# EAGLE board untitled (EAGLE 9.3.1)
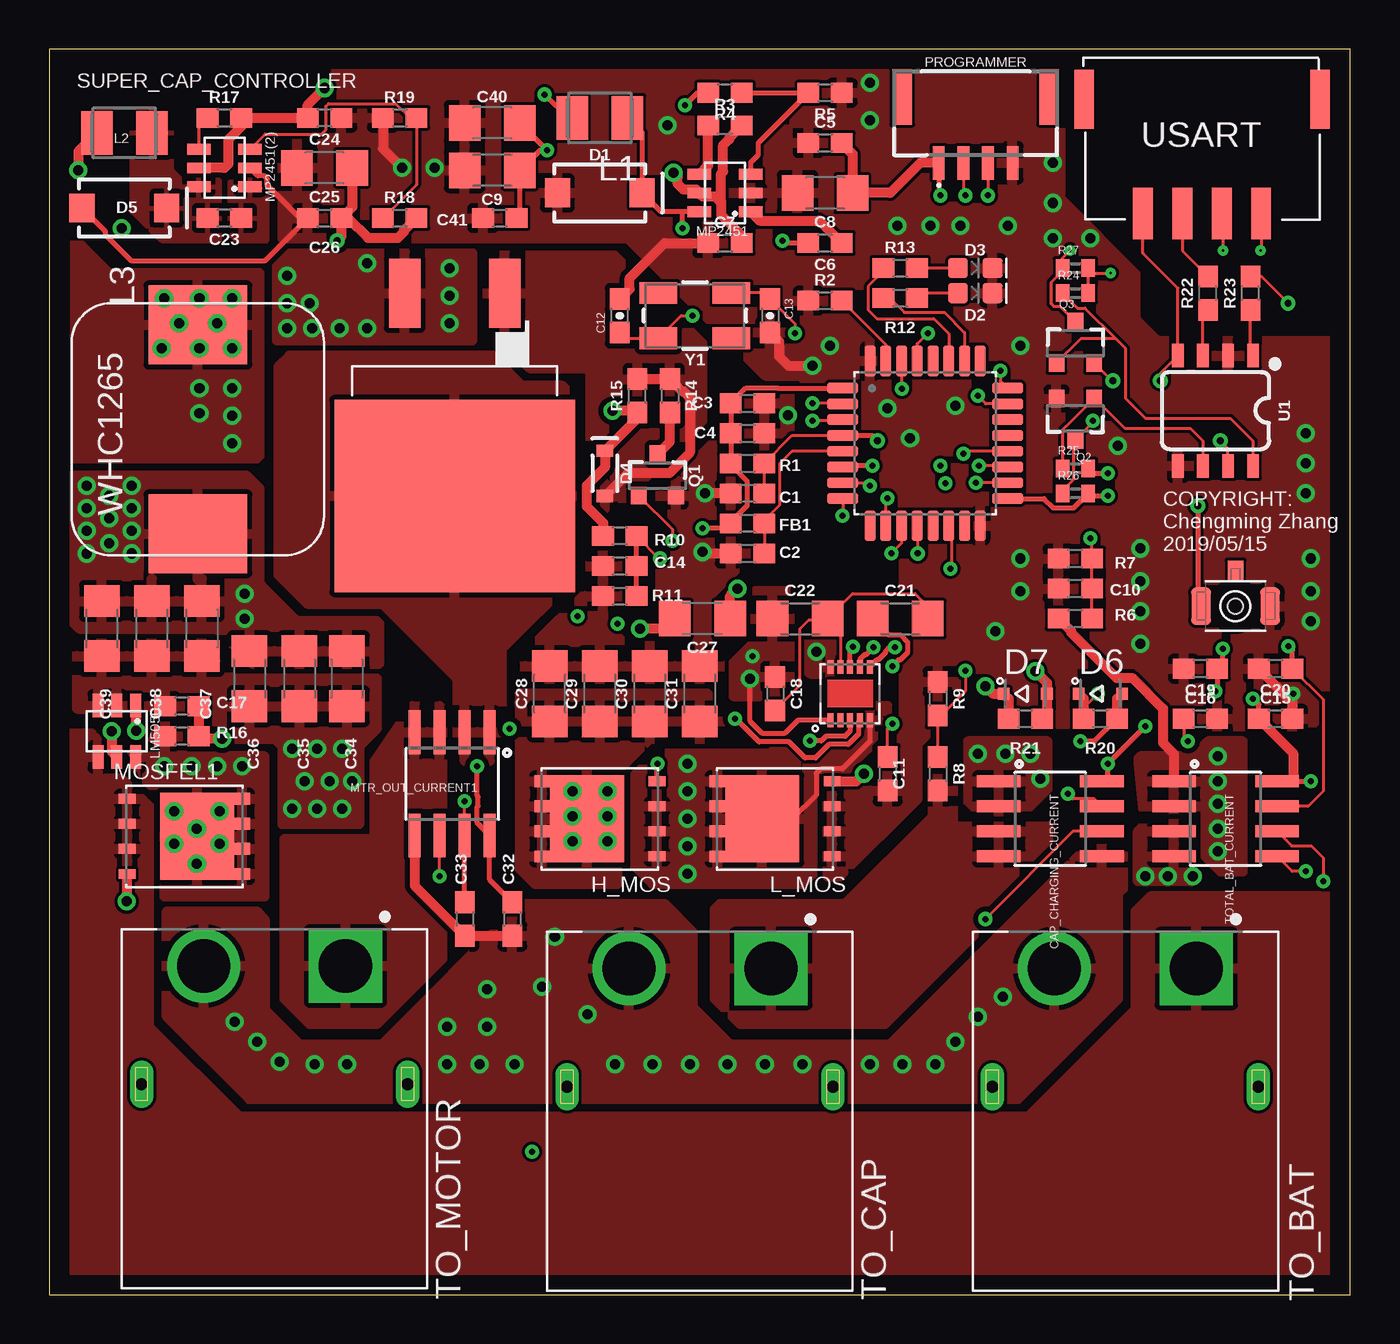
[diagram p0: board, top side]
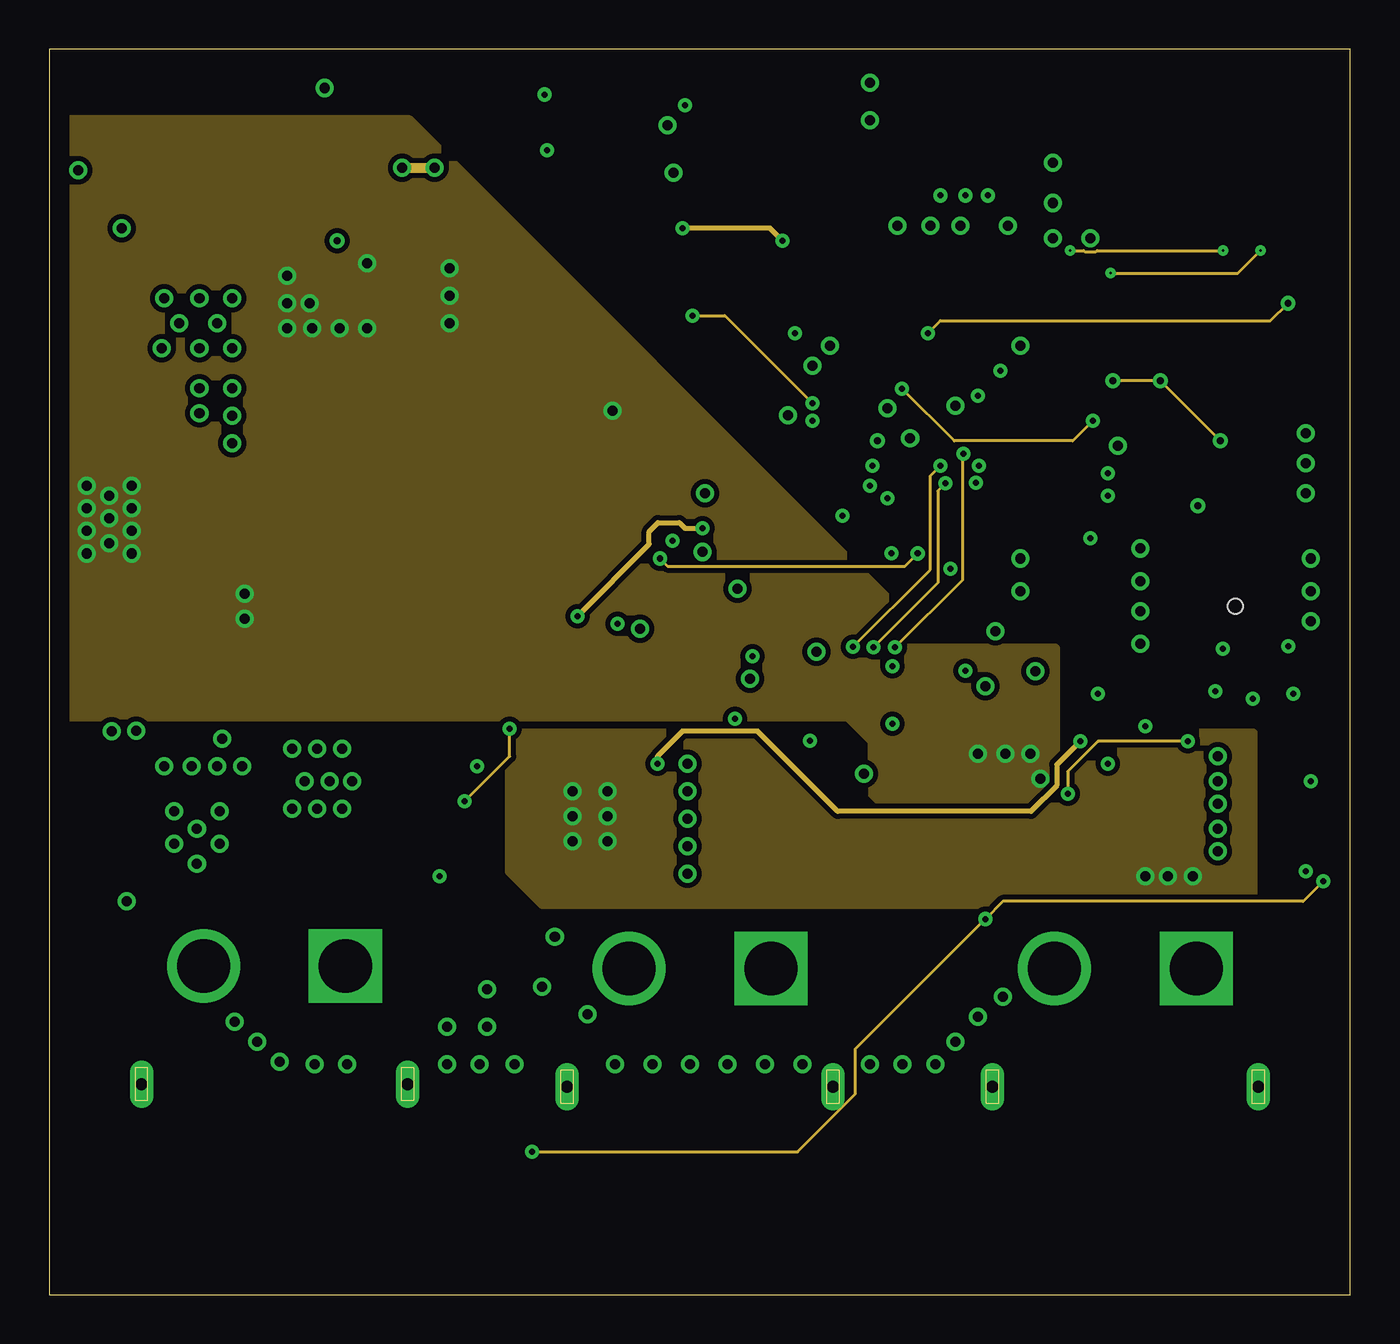
[diagram p1: board, inner layer Signal1]
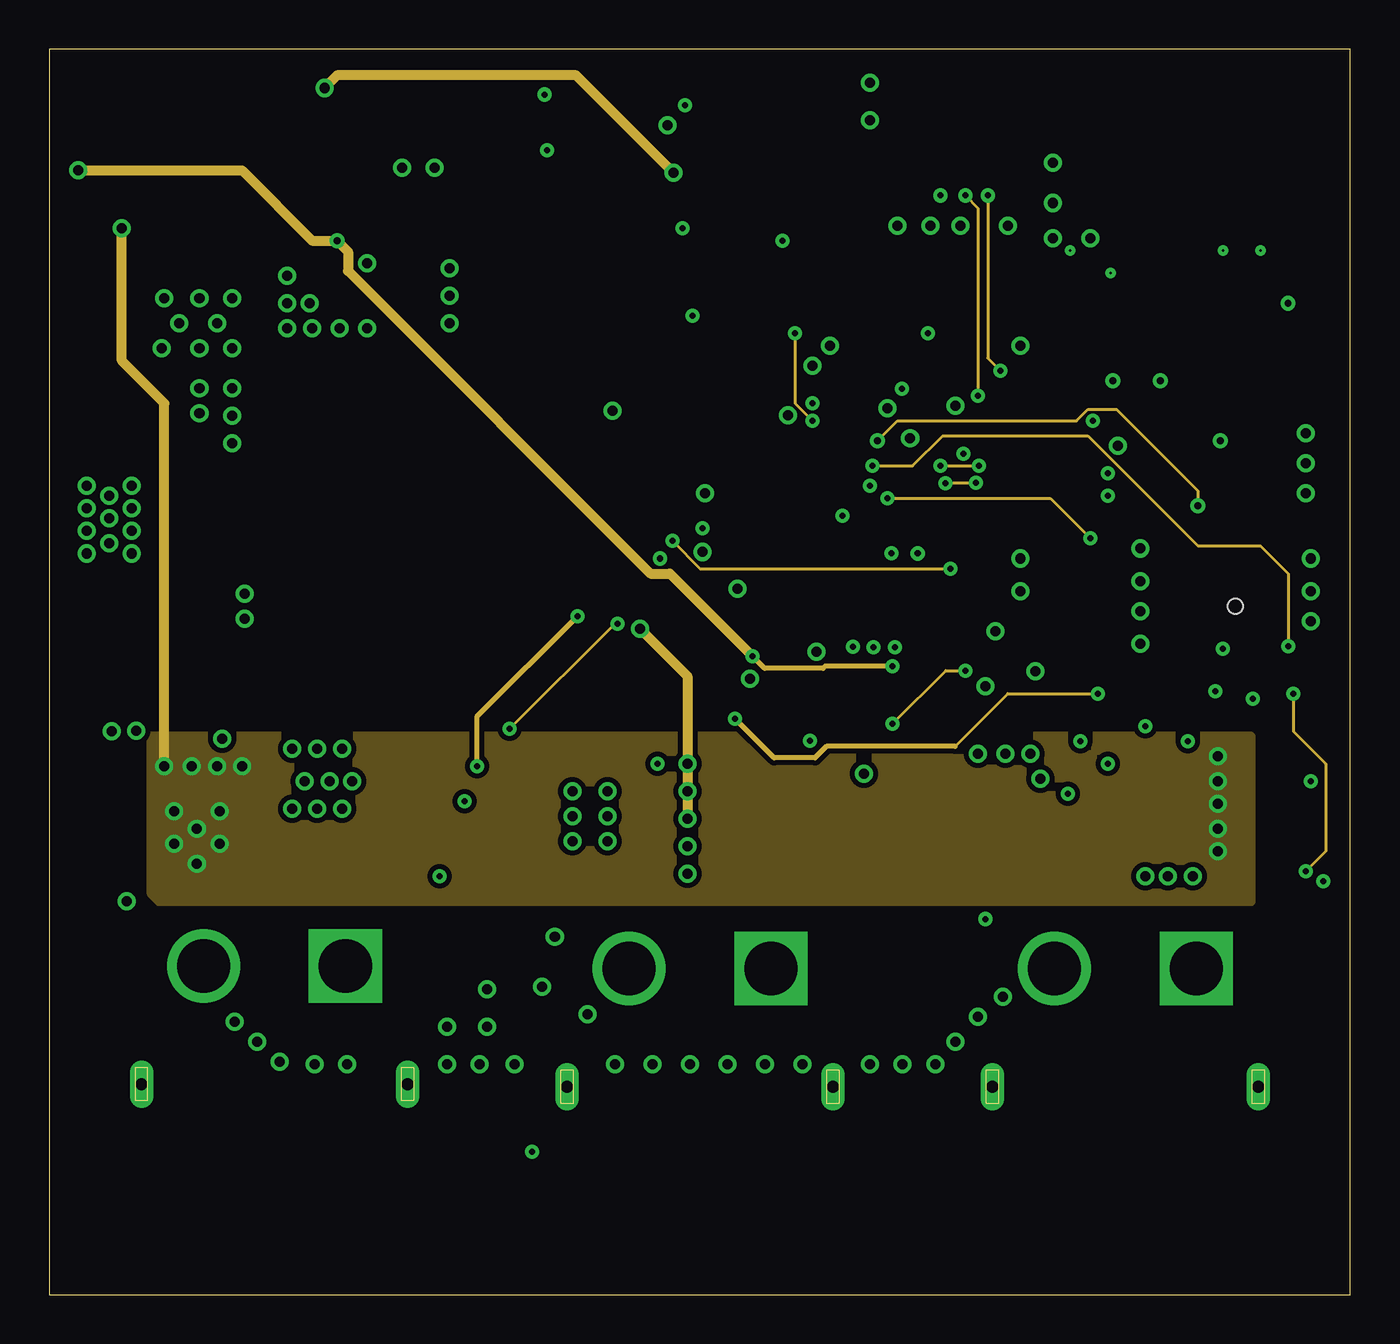
[diagram p2: board, inner layer Signal2]
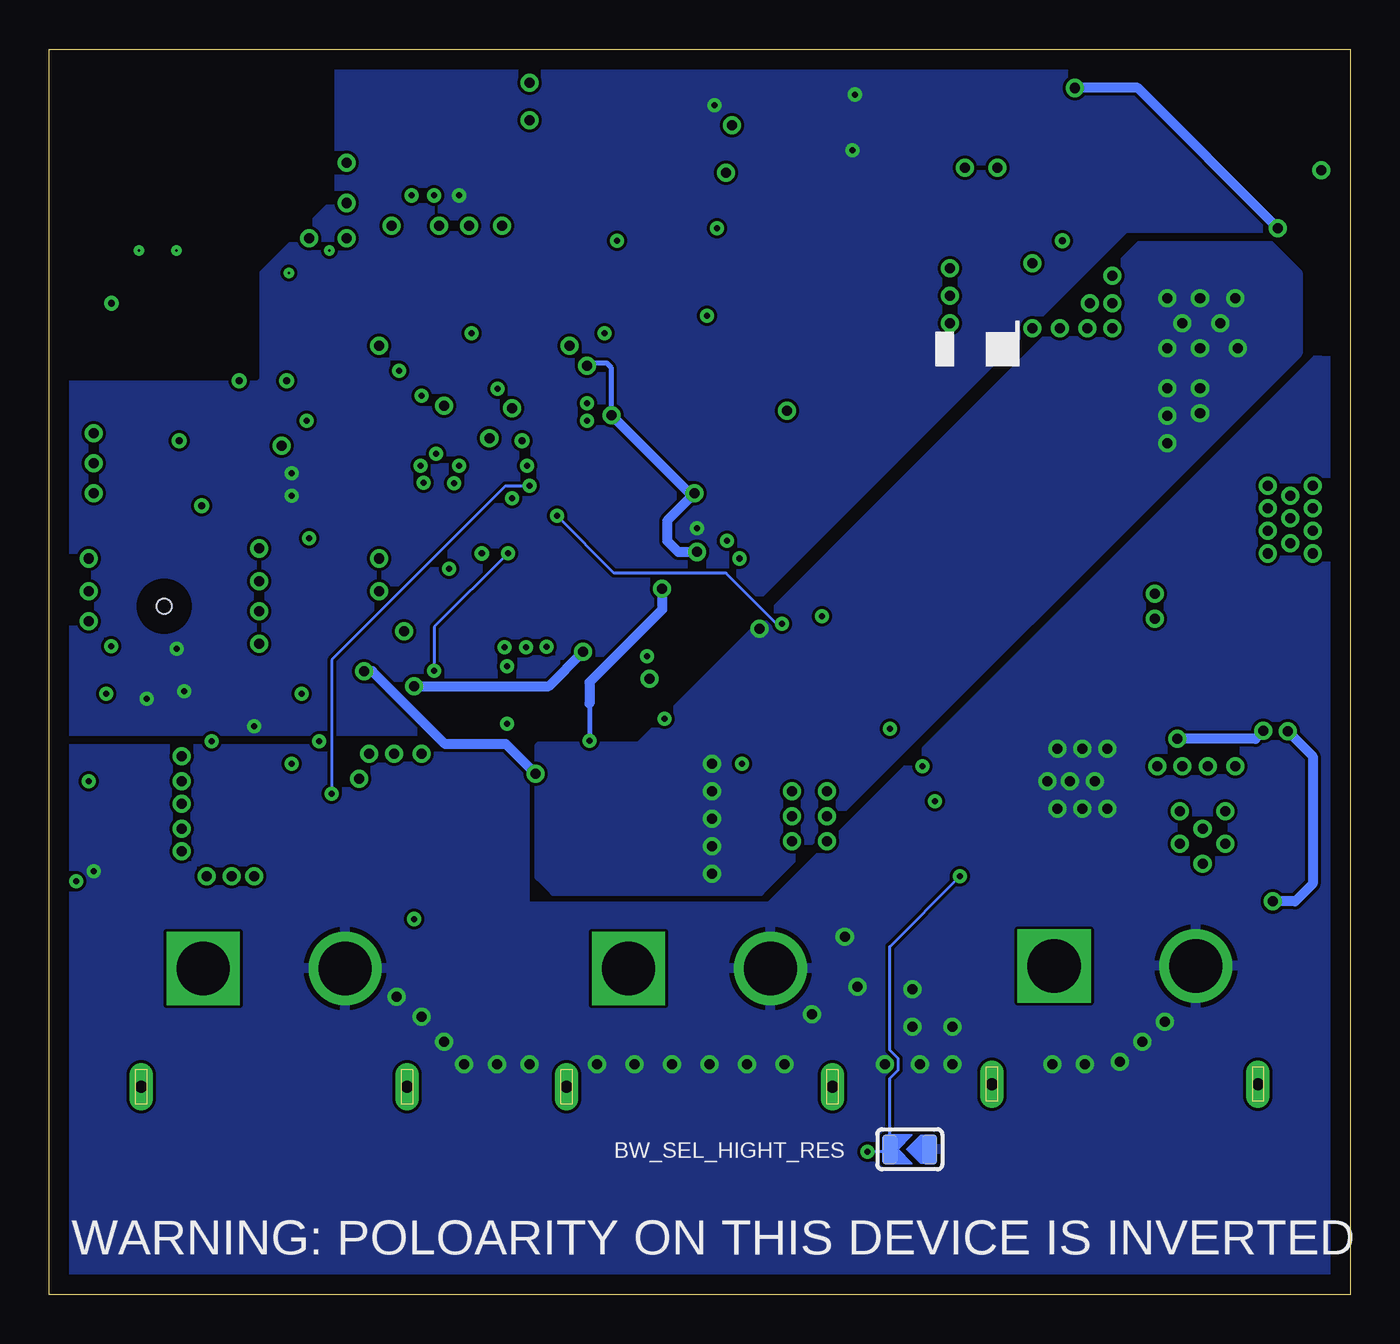
[diagram p3: board, bottom side, seen from below]

Size 66.02 x 63.17 mm. Coordinates in mm from the lower left corner, seen from the top.
Outline: 0,0 66.02,0 66.02,63.17 0,63.17 0,0
Copper layers (1+2*15+16): Top 0.035mm / dielectric 1.5mm / Signal1 0.035mm / dielectric 0.15mm / Signal2 0.035mm / dielectric 0.2mm / Bottom 0.035mm
Design rules "default *": minimum track width 6mil, minimum drill 5mil, track to track 6mil, track to pad 6mil, pad to pad 6mil, via to via 6mil, smd to smd 6mil, copper to edge 40mil, drill to drill 6mil, minimum pad ring 10mil, minimum via ring 8mil, stop-mask expansion 4mil, vias tented up to drill 21mil, thermal gap 10mil
Net classes: 0 default: width 0.508 mm, drill 0.508 mm, clearance 0.254 mm; 1 sig: width 0.127 mm, drill 0.127 mm, clearance 0.127 mm; 2 VCC: width 0.254 mm, drill 0.254 mm, clearance 0.127 mm

## Footprints (pad centres in the part's own frame; a part is rotated, then mirrored left to right if it is on the bottom)
SOLDERJUMPER_ARROW_NOPASTE = smd 0.762 x 1.524: 1 -1.016,0; 2 1.016,0
0603 = smd 1.1 x 1: 1 -0.85,0; 2 0.85,0
1206 = smd 1.6 x 1.8: 1 -1.4,0; 2 1.4,0
0603-CAP = smd 1.1 x 1: 1 -0.85,0; 2 0.85,0
SO08 = smd 0.61 x 2.21: 1 -1.905,-2.616; 2 -0.635,-2.616; 3 0.635,-2.616; 4 1.905,-2.616; 5 1.905,2.616; 6 0.635,2.616; 7 -0.635,2.616; 8 -1.905,2.616
SMA-DIODE = smd 1.27 x 1.47: A -2.15,0; C 2.15,0
LED-0603 = smd 1 x 1: A -0.877,0; C 0.877,0
SOD-323 = smd 0.63 x 0.83: A 1.15,0; C -1.15,0
SOD323 = smd 0.6 x 0.6: A 1.1,0; C -1.1,0
TRANS_BSC076N06NS3-G = smd 0.85 x 0.5: 1 -2.9,1.905; 2 -2.9,0.635; 3 -2.9,-0.635; 4 -2.9,-1.905 | smd 0.8 x 0.6: 5 2.925,-1.905; 6 2.925,-0.635; 7 2.925,0.635; 8 2.925,1.905 | smd 3.75 x 4.41: 9 0.65,0
L3230M = smd 1.6 x 2.2: 1 -1.4,0; 2 1.4,0
WHC1265-10UH = smd 4 x 5: P$1 1.1,6.4; P$2 11.7,6.4
TSOT-23-6-SOT-23-6 = smd 1.2 x 0.55: PIN1 -1.3,0.95; PIN2 -1.3,0; PIN3 -1.3,-0.95; PIN4 1.3,-0.95; PIN5 1.3,0; PIN6 1.3,0.95
D2PAK = smd 1.6 x 3.5: 1 -2.54,-10.28; 3 2.54,-10.28 | smd 12.2 x 9.75: 2 0,0
BM04B-GHS-TBT = smd 0.6 x 1.7: 1 1.915,5.08; 2 3.165,5.08; 3 4.415,5.08; 4 5.665,5.08 | smd 1 x 2.8: A 0.065,1.73; B 7.515,1.73
SOT23-3 = smd 0.8 x 0.9: 1 -0.95,-1; 2 0.95,-1; 3 0,1.1
C0402 = smd 0.7 x 0.9: 1 -0.65,0; 2 0.65,0
SWITCH-TACT-B3U-1100P-B = smd 1 x 1.9: 1 -1.75,0; 2 1.75,0 | smd 0.8 x 1.1: BOSS 0,1.75 | hole 0.762: 0,0
AMASS_XT60PW-M = drill 2.7 square: 1 -3.6,-6 | drill 2.7: 2 3.6,-6 | drill 0.6 pad 1.2 long: S1 -6.75,0; S2 6.75,0
SO08' = smd 0.6 x 1.2: 1 -1.905,-2.8; 2 -0.635,-2.8; 3 0.635,-2.8; 4 1.905,-2.8; 5 1.905,2.8; 6 0.635,2.8; 7 -0.635,2.8; 8 -1.905,2.8
QFP80P900X900X160-32N = smd 1.56 x 0.55: 1 -4.18,2.8; 2 -4.18,2; 3 -4.18,1.2; 4 -4.18,0.4; 5 -4.18,-0.4; 6 -4.18,-1.2; 7 -4.18,-2; 8 -4.18,-2.8; 17 4.18,-2.8; 18 4.18,-2; 19 4.18,-1.2; 20 4.18,-0.4; 21 4.18,0.4; 22 4.18,1.2; 23 4.18,2; 24 4.18,2.8 | smd 0.55 x 1.56: 9 -2.8,-4.18; 10 -2,-4.18; 11 -1.2,-4.18; 12 -0.4,-4.18; 13 0.4,-4.18; 14 1.2,-4.18; 15 2,-4.18; 16 2.8,-4.18; 25 2.8,4.18; 26 2,4.18; 27 1.2,4.18; 28 0.4,4.18; 29 -0.4,4.18; 30 -1.2,4.18; 31 -2,4.18; 32 -2.8,4.18
QFN10 = smd 0.7 x 0.3: 1 -0.08,-0.27; 2 -0.08,-0.77; 3 -0.08,-1.27; 4 -0.08,-1.77; 5 -0.08,-2.27; 6 2.62,-2.27; 7 2.62,-1.77; 8 2.62,-1.27; 9 2.62,-0.77; 10 2.62,-0.27
S4B-PH-SM4_TB = smd 1 x 2.6: 1 3.27,7.9; 2 5.27,7.9; 3 7.27,7.9; 4 9.27,7.9 | smd 1 x 3: GND 0.286,2.1; GND2 12.254,2.1
CRYSTAL-SMD-5X3.2-4PAD = smd 1.9 x 1.1: 1 -1.85,-1.15; 2 1.85,-1.15; 3 1.85,1.15; 4 -1.85,1.15

## Placement (x,y rotation side)
BW_SEL_HIGHT_RES  [SOLDERJUMPER_ARROW_NOPASTE]  22.35,7.37 180 bottom
C1  0.1uF  [0603]  35.43,40.64 180 top
C2  4.7uF  [0603]  35.43,37.59 180 top
C3  0.1uF  [0603]  35.43,45.21 0 top
C4  0.1uF  [0603]  35.43,43.69 0 top
C5  0.1uF  [0603]  39.37,58.42 0 top
C6  0.1uF  [0603]  39.37,53.34 180 top
C7  0.1uF  [0603]  34.29,53.34 0 top
C8  4.7uF  [1206]  39.37,55.88 180 top
C9  4.7uF  [1206]  22.48,57.02 180 top
C10  0.1uF  [0603]  52.07,35.81 180 top
C11  0.1uF  [0603]  42.55,26.42 270 top
C12  22p  [0603-CAP]  28.96,49.66 90 top
C13  22p  [0603-CAP]  36.58,49.66 270 top
C14  0.1uF  [0603]  28.96,36.96 180 top
C15  0.1uF  [0603]  62.23,29.21 0 top
C16  1nF  [0603]  58.42,29.21 0 top
C17  0.1uF  [0603]  6.73,29.84 180 top
C18  0.1uF  [0603]  36.83,30.48 270 top
C19  0.1uF  [0603]  58.42,31.75 180 top
C20  1nF  [0603]  62.23,31.75 180 top
C21  4.7uF  [1206]  43.18,34.29 0 top
C22  4.7uF  [1206]  38.1,34.29 0 top
C23  0.1uF  [0603]  8.89,54.61 180 top
C24  0.1uF  [0603]  13.97,59.69 180 top
C25  4.7uF  [1206]  13.97,57.15 180 top
C26  0.1uF  [0603]  13.97,54.61 0 top
C27  4.7uF  [1206]  33.15,34.29 180 top
C28  4.7uF  [1206]  25.4,30.48 90 top
C29  4.7uF  [1206]  27.94,30.48 90 top
C30  4.7uF  [1206]  30.48,30.48 90 top
C31  4.7uF  [1206]  33.02,30.48 90 top
C32  0.1uF  [0603]  23.5,19.05 270 top
C33  1nF  [0603]  21.08,19.05 270 top
C34  22uF  [1206]  15.11,31.24 270 top
C35  22uF  [1206]  12.7,31.24 270 top
C36  22uF  [1206]  10.16,31.24 270 top
C37  22uF  [1206]  7.75,33.78 270 top
C38  22uF  [1206]  5.21,33.78 270 top
C39  22uF  [1206]  2.67,33.78 270 top
C40  4.7uF  [1206]  22.48,59.44 180 top
C41  0.1uF  [0603]  22.86,54.61 0 top
CAP_CHARGING_CURRENT  ACS723  [SO08]  50.8,24.13 270 top
D1  3A/40V/500mV  [SMA-DIODE]  27.94,55.88 0 top
D2  RED  [LED-0603]  46.99,50.8 0 top
D3  GREEN  [LED-0603]  46.99,52.07 0 top
D4  MMSZ5242/12v  [SOD-323]  28.19,41.66 270 top
D5  3A/40V/500mV  [SMA-DIODE]  3.81,55.12 0 top
D6  1N4148WS  [SOD323]  53.34,30.48 0 top
D7  1N4148WS  [SOD323]  49.53,30.48 0 top
FB1  600Ω/1.8A  [0603]  35.43,39.12 180 top
H_MOS  BSC018N04  [TRANS_BSC076N06NS3-G]  27.94,24.13 180 top
L1  SWPA3012S4R7MT  [L3230M]  27.94,59.69 180 top
L2  SWPA3012S4R7MT  [L3230M]  3.81,58.93 180 top
L3  WHC1265-10UH  [WHC1265-10UH]  1.14,50.29 270 top
L_MOS  BSC018N04  [TRANS_BSC076N06NS3-G]  36.83,24.13 180 top
LM5050  LM5050  [TSOT-23-6-SOT-23-6]  3.43,28.57 270 top
MOSFEL1  BSC018N04  [TRANS_BSC076N06NS3-G]  6.86,23.24 0 top
MOTOR_MOS  IRF4905S  [D2PAK]  20.57,40.51 180 top
MP2451  MP2451  [TSOT-23-6-SOT-23-6]  34.29,55.88 180 top
MP2451(2)  MP2451  [TSOT-23-6-SOT-23-6]  8.89,57.15 180 top
MTR_OUT_CURRENT1  ACS723  [SO08]  20.45,25.91 180 top
PROGRAMMER  BM04B-GHS-TBT  [BM04B-GHS-TBT]  50.8,62.48 180 top
Q1  S8050/25v 500mW  [SOT23-3]  30.86,41.53 0 top
Q2  NPN  [SOT23-3]  52.07,44.45 180 top
Q3  NPN  [SOT23-3]  52.07,48.26 0 top
R1  10K  [0603]  35.43,42.16 0 top
R2  10K  [0603]  39.37,50.42 0 top
R3  100K  [0603]  34.29,59.31 0 top
R4  124K  [0603]  34.29,60.96 180 top
R5  40.2k  [0603]  39.37,60.96 180 top
R6  16.2k  [0603]  52.07,34.29 180 top
R7  1.69k  [0603]  52.07,37.34 0 top
R8  16.2k  [0603]  45.09,26.42 270 top
R9  1.69k  [0603]  45.09,30.23 270 top
R10  16.2k  [0603]  28.96,38.48 180 top
R11  1.69k  [0603]  28.96,35.43 0 top
R12  1k  [0603]  43.18,50.55 0 top
R13  1k  [0603]  43.18,52.07 0 top
R14  100  [0603]  31.5,45.59 270 top
R15  10k  [0603]  29.84,45.59 90 top
R16  100  [0603]  6.73,28.32 180 top
R17  100K  [0603]  8.89,59.69 0 top
R18  124K  [0603]  17.78,54.61 0 top
R19  8.87k  [0603]  17.78,59.69 0 top
R20  470  [0603]  53.34,29.21 0 top
R21  470  [0603]  49.53,29.21 0 top
R22  220  [0603]  58.8,50.8 90 top
R23  220  [0603]  60.96,50.8 90 top
R24  10K  [C0402]  52.07,50.8 0 top
R25  10K  [C0402]  52.07,41.91 0 top
R26  10K  [C0402]  52.07,40.64 0 top
R27  10K  [C0402]  52.07,52.07 0 top
RESET  !RST  [SWITCH-TACT-B3U-1100P-B]  60.2,34.92 0 top
TO_BAT  XT60PW-M  [AMASS_XT60PW-M]  54.61,10.54 180 top
TO_CAP  XT60PW-M  [AMASS_XT60PW-M]  33.02,10.54 180 top
TO_MOTOR  XT60PW-M  [AMASS_XT60PW-M]  11.43,10.67 180 top
TOTAL_BAT_CURRENT  ACS723  [SO08]  59.69,24.13 270 top
U1  DUAL-OPTOISOLATOR_SOIC8  [SO08']  59.18,44.83 180 top
U$1  STM32F334K8T  [QFP80P900X900X160-32N]  44.45,43.18 0 top
U$6  MP1907GQ-Z  [QFN10]  39.37,29.21 90 top
USART  S4B-PH-SM4_TB  [S4B-PH-SM4_TB]  64.77,62.74 180 top
Y1  16MHz  [CRYSTAL-SMD-5X3.2-4PAD]  32.77,49.66 180 top

## Library data of the parts
BW_SEL_HIGHT_RES = microbuilder; BOM: EXCLUDE
C1-C7 C10 C11 C14 C15 C17-C19 C23 C24 C26 C32 C41 = SparkFun-Capacitors; PROD_ID: CAP-00810
C8 C9 C21 C22 C25 C27-C31 C34-C40 = SparkFun-Capacitors; PROD_ID: CAP-10300
C12 C13 RESET = stm32f4stamp; OC_NEWARK: unknown
C16 C20 C33 = SparkFun-Capacitors; PROD_ID: CAP-07886
CAP_CHARGING_CURRENT MTR_OUT_CURRENT1 TOTAL_BAT_CURRENT = SparkFun-Sensors; PART_#: ACS723ACS723LLCTR-05AB-T2; PROD_ID: IC-13872
D1 D5 = SparkFun-DiscreteSemi; PROD_ID: DIO-09886
D2 = SparkFun-LED; PROD_ID: DIO-00819
D3 = SparkFun-LED; PROD_ID: DIO-00821
D4 = SparkFun-DiscreteSemi; PROD_ID: DIO-12442
D6 D7 = 1N4148WS; AVAILABILITY: Unavailable; DESCRIPTION: Diode Switching 75V 0.3A 2-Pin SOD-323 T/R; MF: ON Semiconductor; MP: 1N4148WS; PACKAGE: S-0 Good-Ark; PRICE: None
FB1 = SparkFun-Coils; PROD_ID: NDUC-13805
H_MOS L3 L_MOS LM5050 MOSFEL1 MOTOR_MOS MP2451 MP2451(2) U$1 U$6 USART = NewKevinMade
L1 L2 = rcl; SPICEPREFIX: L
PROGRAMMER = SamacSys_Parts
Q1 = SparkFun-DiscreteSemi; PROD_ID: TRANS-08049
Q2 Q3 R24-R27 = SparkFun
R1-R23 = SparkFun-Resistors
TO_BAT TO_CAP TO_MOTOR = XT60PW-M; AVAILABILITY: Unavailable; MF: AMASS; MP: XT60PW-M; PACKAGE: Package Analog Devices; PRICE: None
U1 = SparkFun-DiscreteSemi; PROD_ID: IC-09076
Y1 = SparkFun-Clocks; PROD_ID: XTAL-08218; SF_ID: COM-00094

## Nets
3V3_FB [sig]: MP2451.PIN3 R4.1 R5.2
12V_FB [sig]: MP2451(2).PIN3 R18.1 R19.2
BAT_VSENSE [sig]: C10.1 R6.1 R7.2 U$1.10
BW_SEL [sig]: BW_SEL_HIGHT_RES.2 CAP_CHARGING_CURRENT.6 MTR_OUT_CURRENT1.6 TOTAL_BAT_CURRENT.6
CAP_CURRENT_SENSE [sig]: C16.1 CAP_CHARGING_CURRENT.7 U$1.7
CAP_VSENSE [sig]: C11.1 R8.1 R9.2 U$1.11
DRV_EN [sig]: U$1.20 U$6.6
DRV_H [sig]: D6.A H_MOS.4 R20.2
DRV_HS_IN [sig]: U$1.18 U$6.7
DRV_L: D7.A L_MOS.4 R21.2
DRV_LS_IN [sig]: U$1.19 U$6.8
GND [sig]: BW_SEL_HIGHT_RES.1 C1.2 C2.2 C3.2 C4.2 C5.1 C7.1 C8.2 C9.2 C10.2 C11.2 C12.2 C13.2 C14.2 C15.2 C16.2 C17.2 C19.2 C20.2 C24.1 C25.2 C26.1 C28.2 C29.2 C30.2 C31.2 C32.2 C33.2 C34.2 C35.2 C36.2 C37.2 C38.2 C39.2 C40.2 C41.1 CAP_CHARGING_CURRENT.5 D1.A D2.C D3.C D5.A L_MOS.1 L_MOS.2 L_MOS.3 LM5050.PIN2 LM5050.PIN3 MP2451(2).PIN2 MP2451.PIN2 MTR_OUT_CURRENT1.5 PROGRAMMER.1 Q1.2 Q2.2 R2.1 R5.1 R7.1 R9.1 R11.1 R19.1 RESET.2 TO_BAT.2 TO_CAP.2 TO_MOTOR.2 TOTAL_BAT_CURRENT.5 U1.2 U1.5 U$1.16 U$1.32
IN_CURRENT_SENSE [sig]: C20.1 TOTAL_BAT_CURRENT.7 U$1.6
LEDG [sig]: R13.1 U$1.27
LEDR [sig]: R12.1 U$1.26
MTR_CURRENT_SENSE [sig]: C33.1 MTR_OUT_CURRENT1.7 U$1.8
MTR_EN [sig]: Q1.1 U$1.14
N$2 [sig]: D2.A R12.2
N$3 [sig]: MP2451.PIN4 R3.1
N$4 [sig]: D3.A R13.2
N$5 [VCC]: C6.1 MP2451.PIN1
N$6 [sig]: C2.1 FB1.1 U$1.5
N$7 [VCC]: C6.2 D1.C L1.1 MP2451.PIN6
N$8 [sig]: R2.2 U$1.31
N$9: Q1.3 R14.2
N$10: D4.A MOTOR_MOS.1 R14.1 R15.2
N$11: C17.1 LM5050.PIN1 R16.1
N$12 [sig]: C18.2 C21.2 C22.2 U$6.9
N$13 [sig]: LM5050.PIN5 MOSFEL1.4
N$14 [sig]: MP2451(2).PIN4 R17.1
N$15 [VCC]: C23.1 MP2451(2).PIN1
N$16 [sig]: C23.2 D5.C L2.1 MP2451(2).PIN6
N$17 [sig]: C27.1 U$6.3
N$18 [sig]: D6.C R20.1 U$6.4
N$19 [sig]: R23.1 U1.1
N$20 [sig]: D7.C R21.1 U$6.10
N$21 [sig]: R22.1 U1.3
NRST [sig]: C1.1 R1.2 RESET.1 U$1.4
OSC_IN [sig]: C12.1 U$1.2 Y1.3
OSC_OUT [sig]: C13.1 U$1.3 Y1.1
OUT1N [sig]: Q3.1 R24.1 U1.8
OUT2N [sig]: Q2.1 R25.1 U1.6
OUT_VSENSE [sig]: C14.1 R10.1 R11.2 U$1.12
PA3 [sig]: U$1.9
PA7 [sig]: U$1.13
PA11 [sig]: U$1.21
PA12 [sig]: U$1.22
PA15 [sig]: U$1.25
PB1 [sig]: U$1.15
PB5 [sig]: U$1.28
RX [sig]: Q2.3 R26.1 U$1.30
SIG_GND [sig]: Q3.2 U1.4 U1.7 USART.4
SIG_RX [sig]: R22.2 USART.3
SIG_TX [sig]: Q3.3 R27.1 USART.2
SIG_VCC [sig]: R24.2 R27.2 USART.1
SYS_SWCLK [sig]: PROGRAMMER.2 U$1.24
SYS_SWDIO [sig]: PROGRAMMER.3 U$1.23
TX [sig]: R23.2 U$1.29
VBAT: C7.2 C24.2 LM5050.PIN6 MOSFEL1.5 MOSFEL1.6 MOSFEL1.7 MOSFEL1.8 MOSFEL1.9 MP2451(2).PIN5 MP2451.PIN5 R3.2 R6.2 R16.2 R17.2 TOTAL_BAT_CURRENT.1 TOTAL_BAT_CURRENT.2
VBAT_RAW [VCC]: LM5050.PIN4 MOSFEL1.1 MOSFEL1.2 MOSFEL1.3 TO_BAT.1
VCAP: CAP_CHARGING_CURRENT.3 CAP_CHARGING_CURRENT.4 R8.2 TO_CAP.1
VCC [VCC]: C3.1 C4.1 C5.2 C8.1 C9.1 C15.1 C19.1 C32.1 C40.1 C41.2 CAP_CHARGING_CURRENT.8 FB1.2 L1.2 MTR_OUT_CURRENT1.8 PROGRAMMER.4 R1.1 R4.2 R25.2 R26.2 TOTAL_BAT_CURRENT.8 U$1.1 U$1.17
VCC_12V [VCC]: C18.1 C21.1 C22.1 C25.1 C26.2 L2.2 R18.2 U$6.1
VMTR: MTR_OUT_CURRENT1.3 MTR_OUT_CURRENT1.4 TO_MOTOR.1
VMTR_T: MOTOR_MOS.2 MTR_OUT_CURRENT1.1 MTR_OUT_CURRENT1.2
VOUT: C34.1 C35.1 C36.1 C37.1 C38.1 C39.1 CAP_CHARGING_CURRENT.1 CAP_CHARGING_CURRENT.2 D4.C L3.P$2 MOTOR_MOS.3 R10.2 R15.1
VSW_NODE [sig]: C27.2 H_MOS.1 H_MOS.2 H_MOS.3 L3.P$1 L_MOS.5 L_MOS.6 L_MOS.7 L_MOS.8 L_MOS.9 U$6.5
VSW_T: C28.1 C29.1 C30.1 C31.1 H_MOS.5 H_MOS.6 H_MOS.7 H_MOS.8 H_MOS.9 TOTAL_BAT_CURRENT.3 TOTAL_BAT_CURRENT.4

## Tracks (layer width: path | path; a pad name or v marks a point on that pad's centre or on a via)
3V3_FB
  Top 0.254: R4.1 R5.2 35.97,58.41 35.97,57.8 35.59,57.42 MP2451.PIN3
12V_FB
  Top 0.152: R18.1 18.63,56.31 R19.2 18.3,59.69 17.57,60.42 14.18,60.42 14.04,60.28 14.04,59.09 13.81,58.86 10.95,58.86 MP2451(2).PIN3
BAT_VSENSE  (via drill 0.3)
  Top 0.152: R6.1 C10.1 R7.2 52.92,38.27 v52.83,38.35 | U$1.10 42.45,40.29 v42.55,40.39
  Signal2 0.152: v42.55,40.39 50.8,40.39 v52.83,38.35
BW_SEL  (via drill 0.3)
  Top 0.152: v19.81,21.21 MTR_OUT_CURRENT1.6 | CAP_CHARGING_CURRENT.6 51.94,23.5 v47.5,19.05 | TOTAL_BAT_CURRENT.6 63.04,22.76 64.05,22.76 64.64,22.16 v64.64,20.95
  Signal1 0.152: v24.51,7.24 37.97,7.24 40.91,10.18 40.91,12.46 47.43,18.99 v47.5,19.05 48.39,19.94 63.63,19.94 v64.64,20.95
  Bottom 0.152: v19.81,21.21 23.37,17.65 23.37,12.4 22.94,11.97 22.94,11.4 23.37,10.97 BW_SEL_HIGHT_RES.2 23.5,7.24 v24.51,7.24
CAP_CURRENT_SENSE  (via drill 0.3)
  Top 0.152: CAP_CHARGING_CURRENT.7 53.03,25.15 51.94,25.15 v51.69,25.4 | C16.1 57.57,28.28 v57.78,28.07 | U$1.7 41.5,41.18 v41.66,41.02
  Signal1 0.152: v51.69,25.4 51.69,26.54 53.21,28.07 v57.78,28.07
  Bottom 0.152: v41.66,41.02 41.67,41.01 42.88,41.01 51.69,32.2 v51.69,25.4
CAP_VSENSE  (via drill 0.3)
  Top 0.152: R8.1 45.09,29.21 | 45.09,29.21 R9.2 | U$1.11 43.25,38.11 v42.75,37.61 | v46.48,31.65 46.48,30.61 45.09,29.21 | C11.1 42.55,28.7 v42.8,28.96
  Signal2 0.152: v42.8,28.96 45.49,31.65 v46.48,31.65
  Bottom 0.152: v42.75,37.61 46.48,33.87 v46.48,31.65
DRV_EN  (via drill 0.3)
  Top 0.152: U$1.20 46.52,42.78 v46.39,42.65
  Top 0.254: v42.93,32.83 42.64,32.83 42.45,32.64 42.45,32.57 42.08,32.2 42.01,32.2 U$6.6
  Signal1 0.152: v42.93,32.83 46.35,36.26 46.35,42.67 46.36,42.68 v46.39,42.65
DRV_H  (via drill 0.3)
  Top 0.254: R20.2 53.05,28.07 v52.32,28.07 | H_MOS.4 30.84,26.9 v30.86,26.92
  Top 0.508: R20.2 54.19,30.23 D6.A
  Signal1 0.254: v52.32,28.07 51.13,26.88 51.13,25.82 49.83,24.51 40.01,24.51 35.94,28.57 32.13,28.57 30.86,27.3 v30.86,26.92
DRV_HS_IN  (via drill 0.3)
  Top 0.152: U$1.18 v47.04,41.18
  Top 0.254: v41.82,32.84 41.44,32.46 41.37,32.46 41.14,32.23 U$6.7
  Signal1 0.152: v41.82,32.84 45.09,36.11 45.09,40.77 v45.47,41.15
  Signal2 0.152: v45.47,41.15 45.5,41.18 v47.04,41.18
DRV_L  (via drill 0.51)
  Top 0.508: L_MOS.4 40.96,26.04 v41.34,26.42 | v50.04,31.62 50.63,31.03 D7.A 50.63,29.46 R21.2
  Bottom 0.508: v41.34,26.42 42.85,27.93 45.93,27.93 49.62,31.62 v50.04,31.62
DRV_LS_IN  (via drill 0.3)
  Top 0.152: U$1.19 48.56,42.05 v47.17,42.05
  Top 0.254: U$6.8 40.64,32.71 v40.78,32.85
  Signal1 0.152: v40.78,32.85 44.7,36.78 44.7,41.53 v45.21,42.04
  Signal2 0.152: v45.21,42.04 47.16,42.04 v47.17,42.05
GND  (via drill 0.3, 0.51)
  Top 0.152: v63.13,30.48 63.13,29.26 C15.2 | v63.75,21.46 63.07,21.46 TOTAL_BAT_CURRENT.5
  Top 0.254: D5.A 2.85,53.93 2.85,53.76 4.15,52.45 10.96,52.45 C26.1 12.73,54.61 11.07,56.27 11.07,56.59 10.91,56.75 10.59,56.75 MP2451(2).PIN2
  Top 0.508: MTR_OUT_CURRENT1.5 18.54,20.74 C33.2 C32.2 | C20.2 63.08,30.05 C15.2 | C12.2 29.46,51.01 29.46,51.57 31.23,53.34 C7.1 | R19.1 16.93,58.13 v17.91,57.15 | C13.2 37.03,48.35 37.03,47.59 37.51,47.12 v38.73,47.12 | C1.2 v33.27,40.64 | v33.15,37.67 33.23,37.59 C2.2
  Signal1 0.508: v17.91,57.15 v19.56,57.15
  Signal2 0.152: v63.13,30.48 63.13,28.56 64.77,26.92 64.77,22.48 v63.75,21.46
  Bottom 0.254: v38.73,47.12 38.61,47.24 37.72,47.24 37.49,47.01 v37.49,44.6
  Bottom 0.508: v37.49,44.6 33.53,40.64 v33.27,40.64 34.67,39.24 34.67,38.23 34.11,37.67 v33.15,37.67
  other vias: 50.93,55.37 52.83,53.59 50.93,53.59 43.05,54.23 49.28,48.13 49.28,37.34 49.28,35.69 55.37,36.2 55.37,34.67 55.37,33.02 55.37,37.85 42.55,44.96 45.97,45.09 43.69,43.43 39.62,48.13 31.37,59.31 12.32,27.69 13.59,27.69 14.86,27.69 15.37,26.04 14.22,26.04 12.95,26.04 12.32,24.64 13.59,24.64 14.86,24.64 9.4,13.84 10.54,12.83 11.68,11.81 13.46,11.68 15.11,11.68 20.19,11.68 21.84,11.68 23.62,11.68 22.23,13.59 22.23,15.49 28.7,11.68 30.61,11.68 32.51,11.68 34.42,11.68 36.32,11.68 38.23,11.68 41.66,11.68 43.31,11.68 44.96,11.68 48.39,15.11 47.12,14.1 45.97,12.83 25.02,15.62 27.3,14.22 25.65,18.16 20.19,13.59 41.66,59.56 41.66,61.47 44.7,54.23 46.23,54.23 48.64,54.23 50.93,57.4 63.75,43.69 63.75,42.16 63.75,40.64 64.01,37.34 64.01,35.69 64.01,34.16 54.23,43.05 48.01,33.66
  pour Top: 5.97,19.43 10.54,19.43 10.92,19.05 10.92,14.48 12.7,12.7 16.89,12.7 24,19.81 31.24,19.81 32.64,18.41 32.64,14.61 34.54,12.7 42.67,12.7 52.58,22.61 54.48,22.61 54.48,20.57 54.23,20.32 54.23,14.99 49.15,9.91 10.16,9.91 5.97,14.1
  pour Top: 1.4,33.02 1.4,29.72 8.26,29.72 8.26,28.32 8.38,28.19 11.43,28.19 11.81,27.81 11.81,23.88 15.75,23.88 15.75,27.81 16.64,28.7 16.64,31.24 9.27,31.24 8.13,32.38 8.13,33.02
  pour Top: 24.13,32.77 24.13,31.24 34.04,31.24 34.04,32.89 29.34,32.89 28.83,33.4 28.83,37.47 27.43,37.47 27.43,35.81 24.38,32.77
  pour Top: 30.99,40.77 30.99,37.08 37.59,37.08 37.59,45.72 36.83,46.48 34.67,46.48 34.42,46.23 34.04,45.85 34.04,43.56 31.37,40.89 30.99,40.89
  pour Top: 11.81,62.74 11.81,53.59 29.34,53.59 36.32,46.61 38.1,46.61 38.35,46.35 38.35,36.32 47.24,36.32 51.56,32 55.12,32 56.26,30.86 56.26,29.08 56.52,28.83 64.01,28.83 65.66,30.48 65.66,62.87 11.81,62.87 11.68,62.74
  pour Bottom: -0.76,19.68 -0.76,-0.51 66.67,-0.51 66.67,27.69 41.91,27.69 41.91,19.68
  pour Top: 39.5,25.27 39.5,21.21 40.13,21.21 44.07,25.15 44.07,27.94 45.09,28.96 51.94,28.96 51.94,37.85 43.35,37.85 43.35,28.41 40.22,25.27
  pour Bottom: -0.51,47.37 -0.51,15.11 34.04,15.11 1.65,47.5 1.52,47.37
  pour Top: 30.86,36.96 30.86,35.43 32.51,35.43 32.77,35.18 32.77,31.5 33.53,31.5 33.53,35.31 34.54,36.32 35.31,37.08 35.31,38.23 32.77,38.23 32.64,38.1 32.51,38.1 31.75,37.34 31.24,37.34
  cutout Top: 51.69,61.98 51.69,55.75 55.5,51.94 55.5,49.66 56.39,48.77 65.02,48.77 65.02,61.98
  cutout Bottom: 51.69,62.1 51.69,55.75 55.5,51.94 55.5,46.48 65.05,46.48 65.05,62 65.15,62.1
IN_CURRENT_SENSE  (via drill 0.3)
  Top 0.152: C20.1 64.64,30.19 64.64,25.53 63.88,24.77 TOTAL_BAT_CURRENT.7
  Top 0.254: C20.1 63.08,32.68 v62.87,32.89 | v41.78,42.04 40.33,42.04 U$1.6
  Signal2 0.152: v41.78,42.04 43.81,42.04 45.34,43.56 52.7,43.56 58.29,37.97 61.47,37.97 62.87,36.58 v62.87,32.89
LEDG
  Top 0.152: U$1.27 45.65,48.75 44.89,49.51 41.99,49.51 41.55,49.95 41.55,51.14 42.33,51.92 R13.1
LEDR
  Top 0.152: R12.1 42.66,50.55 43.38,49.82 45.43,49.82 46.45,48.8 U$1.26
MTR_CURRENT_SENSE  (via drill 0.3)
  Top 0.152: MTR_OUT_CURRENT1.7 v21.08,25.02 | U$1.8 v40.27,39.51 v40.26,39.5
  Top 0.254: C33.1 MTR_OUT_CURRENT1.7
  Signal1 0.152: v21.08,25.02 23.37,27.3 v23.37,28.7
  Signal2 0.152: v23.37,28.7 28.7,34.04 v28.83,34.04
  Bottom 0.152: v28.83,34.04 29.11,34.04 31.68,36.6 37.36,36.6 v40.26,39.5
MTR_EN  (via drill 0.3)
  Top 0.152: Q1.1 31.62,38.82 v31.62,38.23 | U$1.14 45.78,38.87 45.78,36.89 v45.72,36.83
  Signal2 0.152: v31.62,38.23 33.02,36.83 v45.72,36.83
N$2
  Top 0.152: D2.A 44.28,50.8 R12.2
N$3
  Top 0.508: MP2451.PIN4 33.44,57.28 R3.1
N$4
  Top 0.152: D3.A R13.2
N$5
  Top 0.508: MP2451.PIN1 36.04,54.48 39.08,54.48 C6.1
N$6
  Top 0.152: C2.1 FB1.1 36.28,39.27 37.06,40.05 37.06,42.14 37.7,42.78 U$1.5
N$7  (via drill 0.3)
  Top 0.254: L1.1 30.09,58.94 D1.C 31.04,54.93 32.13,54.93 | MP2451.PIN6 32.13,54.93 | C6.2 37.34,53.34 v37.21,53.47 | v32.13,54.1 32.13,54.93
  Signal1 0.254: v37.21,53.47 36.58,54.1 v32.13,54.1
N$8
  Top 0.152: R2.2 42.45,48.19 U$1.31
N$9
  Top 0.508: Q1.3 31.5,43.26 R14.2
N$10
  Top 0.508: R15.2 R14.1 32.14,45.8 32.21,45.8 32.5,45.5 32.5,42.7 31.47,41.67 29.36,41.67 D4.A
  pour Top: 22.23,52.58 22.23,49.15 24.38,46.99 27.43,46.99 27.43,39.75 28.57,39.75 33.15,44.32 33.15,48.26 28.7,52.7 22.35,52.7
N$11  (via drill 0.51)
  Top 0.508: C17.1 R16.1 7.71,28.19 v8.76,28.19 | LM5050.PIN1 4.38,28.63 v4.4,28.61
  Bottom 0.508: v4.4,28.61 4.82,28.19 v8.76,28.19
N$12
  Top 0.152: 39.56,34.23 C22.2 40.77,35.56 43.94,35.56 44.58,34.92 C21.2 | 39.56,34.23 40.14,33.65 U$6.9 | C18.2 38.1,30.9 38.1,33.78 38.55,34.23 39.56,34.23
N$13  (via drill 0.51)
  Top 0.508: v3.17,28.57 3.17,27.53 LM5050.PIN5 | v3.94,19.94 3.96,19.96 MOSFEL1.4
  Bottom 0.508: v3.17,28.57 1.91,27.3 1.91,20.83 2.79,19.94 v3.94,19.94
N$14
  Top 0.152: R17.1 7.59,59.24 MP2451(2).PIN4
N$15
  pour Top: 9.14,56.39 9.14,53.85 9.53,53.47 11.05,53.47 11.05,56.52 9.27,56.52
N$16
  pour Top: 4.19,60.07 4.19,54.99 5.71,53.47 8.64,53.47 8.64,56.52 6.73,56.52 6.22,57.02 6.22,60.07
N$17  (via drill 0.3, 0.51)
  Top 0.254: U$6.3 40.64,28.57 40.39,28.32 39.41,28.32 39.18,28.09 v38.61,28.09
  Top 0.508: C27.1 34.55,35.44 v34.92,35.81
  Bottom 0.254: 38.61,29.97 v38.61,28.09
  Bottom 0.508: v34.92,35.81 34.92,34.74 38.61,31.06 38.61,29.97
N$18  (via drill 0.3)
  Top 0.152: R20.1 52.49,29.76 v53.21,30.48
  Top 0.254: U$6.4 41.07,29.06 41.07,28.43 40.55,27.91 39.57,27.91 38.89,27.23 38.35,27.23 37.54,28.04 36.03,28.04 34.86,29.21 v34.8,29.21
  Top 0.508: R20.1 52.49,30.23 D6.C
  Signal2 0.152: 45.97,27.81 48.64,30.48 v53.21,30.48
  Signal2 0.254: 45.97,27.81 39.45,27.81 38.86,27.23 36.78,27.23 v34.8,29.21
N$19
  Top 0.152: U1.1 60.96,47.76 R23.1
N$20  (via drill 0.51)
  Top 0.508: v47.5,30.86 47.88,30.48 D7.C 48.68,30.23 R21.1 | 38.92,32.55 v38.92,32.61
  Bottom 0.508: v47.5,30.86 40.67,30.86 v38.92,32.61
  pour Top: 38.48,33.15 38.48,31.62 38.61,31.5 39.75,31.5 39.75,33.15
N$21
  Top 0.152: U1.3 58.55,49.7 R22.1
NRST  (via drill 0.35)
  Top 0.152: C1.1 R1.2 37.7,43.58 U$1.4
  Top 0.254: U$1.4 41.76,43.58 v42.04,43.31 | v58.29,40.01 58.29,35.08 RESET.1
  Signal2 0.152: v42.04,43.31 43.05,44.32 52.13,44.32 52.72,44.91 54.15,44.91 58.29,40.77 v58.29,40.01
OSC_IN  (via drill 0.3)
  Top 0.152: C12.1 29.26,48.51 Y1.3 32.07,49.66 v32.64,49.66 | U$1.2 40.24,45.21 v38.73,45.21
  Signal1 0.152: v32.64,49.66 34.29,49.66 v38.73,45.21
OSC_OUT  (via drill 0.3)
  Top 0.152: Y1.1 36.28,50.81 C13.1 37.85,49.24 v37.85,48.77 | U$1.3 40.21,44.32 v38.73,44.32
  Signal2 0.152: v37.85,48.77 37.85,45.21 v38.73,44.32
OUT1N
  Top 0.152: R24.1 52.18,50.04 52.56,50.04 54.1,48.51 | U1.8 61.09,43.31 59.94,44.45 55.63,44.45 54.99,45.09 54.61,45.47 54.61,47.99 54.1,48.51 | Q3.1 52.37,48.51 54.1,48.51
OUT2N
  Top 0.152: R25.1 51.42,43.87 51.58,44.03 51.6,44.03 Q2.1 53.06,45.45 53.58,44.93 53.6,44.93 54.59,43.94 57.91,43.94 58.55,43.31 U1.6
OUT_VSENSE  (via drill 0.3)
  Top 0.152: v30.99,37.34 30.95,37.34 R10.1 | U$1.12 44.05,37.61 v44.07,37.59
  Top 0.254: R11.2 C14.1 R10.1
  Signal1 0.152: v30.99,37.34 31.37,36.96 43.43,36.96 v44.07,37.59
RX  (via drill 0.3)
  Top 0.152: R26.1 51.42,40.79 52,41.37 52,43.28 Q2.3 52.96,44.24 v52.96,44.32 | U$1.30 43.25,45.98 v43.28,45.95
  Signal1 0.152: v43.28,45.95 45.93,43.3 51.94,43.3 v52.96,44.32
SIG_GND  (via drill 0.35)
  Top 0.152: 57.32,47.63 U1.4 | Q3.2 53.92,46.35 v53.98,46.35 | U1.4 56.39,46.74 v56.39,46.35 | U1.4 57.28,51.05 55.5,52.83 USART.4 | U1.7 59.82,42.93 v59.44,43.31
  Signal1 0.152: v53.98,46.35 v56.39,46.35 v59.44,43.31
SIG_RX
  Top 0.152: 58.83,51.68 R22.2 57.5,52.95 USART.3
SIG_TX  (via drill 0.13)
  Top 0.152: Q3.3 51.31,50.12 50.98,50.12 50.84,50.26 50.84,51.34 51.42,51.92 R27.1 51.42,52.56 v51.82,52.96 | USART.2 59.56,54.77 v59.56,52.96
  Signal1 0.152: v51.82,52.96 52.5,52.96 52.55,52.91 53.12,52.91 53.17,52.96 v59.56,52.96
SIG_VCC  (via drill 0.13)
  Top 0.152: R24.2 R27.2 52.97,51.82 v53.85,51.82 | USART.1 61.5,52.99 v61.47,52.96
  Signal1 0.152: v53.85,51.82 60.33,51.82 v61.47,52.96
SYS_SWCLK  (via drill 0.3)
  Top 0.152: PROGRAMMER.2 47.63,55.76 v47.62,55.75 | v48.26,46.86 48.26,46.35 U$1.24
  Signal2 0.152: v47.62,55.75 47.62,47.5 v48.26,46.86
SYS_SWDIO  (via drill 0.3)
  Top 0.152: PROGRAMMER.3 46.38,55.85 v46.48,55.75 | U$1.23 47.53,45.18 v47.12,45.59
  Signal2 0.152: v46.48,55.75 47.12,55.12 v47.12,45.59
TX  (via drill 0.3, 0.35)
  Top 0.152: U$1.29 44.05,48.24 v44.58,48.77 | R23.2 61.51,51.65 v62.87,50.29
  Signal1 0.152: v44.58,48.77 45.21,49.4 61.98,49.4 v62.87,50.29
VBAT  (via drill 0.51)
  Top 0.508: MP2451(2).PIN5 8.89,57.15 9.08,57.34 9.08,58.59 9.74,59.24 R17.2 C24.2 13.12,60.36 v13.97,61.21 | 34.1,55.41 33.8,55.71 33.16,55.71 MP2451.PIN5 32.82,56.05 32.18,56.05 31.88,56.34 31.88,56.69 v31.68,56.9 | 34.1,55.41 34.1,54.77 35.14,53.73 C7.2 | MOSFEL1.9 7.49,23.26 v7.49,23.62 | MOSFEL1.9 7.51,23.38 v8.64,24.51 | MOSFEL1.9 8.26,23.24 v8.64,22.86 | MOSFEL1.9 7.51,21.86 v7.49,21.84 | MOSFEL1.9 7.13,22.86 v6.35,22.86 | MOSFEL1.9 6.35,24.4 v6.35,24.51 | R6.2 51.86,33.65 51.86,33.58 54.15,31.29 54.95,31.29 56.51,29.73 56.51,27.99 57.07,27.43 TOTAL_BAT_CURRENT.1 | 34.1,55.41 34.1,56.86 34.2,56.96 34.2,58.3 34.5,58.6 34.5,58.67 R3.2
  Signal2 0.508: v31.68,56.9 26.73,61.84 14.61,61.84 v13.97,61.21 | v5.84,26.8 5.84,45.21 3.68,47.37 v3.68,54.1
  Bottom 0.508: v3.68,54.1 10.79,61.21 v13.97,61.21
  other vias: 7.24,26.8 8.51,26.8 9.78,26.8 59.31,26.04 59.31,24.89 59.31,23.62 59.31,22.48 59.31,27.3
  pour Top: 3.94,28.07 4.95,26.04 5.84,25.15 5.84,20.19 10.92,20.19 10.92,27.3 6.99,27.3 6.73,27.56 6.73,28.96 4.83,28.96
  pour Signal2: 5.21,28.32 60.96,28.32 60.96,19.94 5.59,19.94 5.21,20.32
  pour Top: 55.24,27.18 55.5,24.64 58.29,24.64 58.67,24.26 58.67,22.23 59.44,21.46 60.58,21.46 60.58,28.07 58.8,28.07 58.04,27.3 55.37,27.3
VBAT_RAW
  pour Top: 5.08,13.59 5.08,24.77 3.68,26.16 2.79,26.16 2.41,26.54 2.41,28.19 2.16,28.45 -0.51,28.45 -0.51,-1.02 66.42,-1.02 66.8,-0.64 66.8,20.19 55.88,20.19 55.12,19.43 55.12,14.48 49.66,9.02 9.65,9.02
VCAP
  pour Top: 44.83,26.16 45.85,26.16 45.85,23.75 50.67,23.75 50.67,21.97 42.42,13.72 35.05,13.72 33.78,14.99 33.78,19.56 34.04,19.81 40.39,19.81 44.83,24.26
VCC  (via drill 0.3)
  Top 0.254: U$1.1 36.96,45.98 36.95,45.99 35.36,45.99 C3.1 C4.1 R1.1 34.58,42.09 35.41,41.26 35.41,40.02 34.58,39.2 FB1.2 34.33,38.86 v33.15,38.86 | 24.13,59.69 C40.1 v25.27,58.04 | 33.02,60.96 R4.2 32.89,60.96 v32.26,60.33 | v53.72,40.51 52.85,40.51 R26.2 51.99,39.91 50.95,39.91 50.48,40.38 U$1.17 | L1.2 26.33,59.69 v25.15,60.88 | v25.27,58.04 | v25.27,58.04 24.9,58.04 C9.1 23.88,54.78 C41.2 | PROGRAMMER.4 45.13,55.83 v45.21,55.75 | v59.56,32.77 59.56,32.04 C19.1 59.27,30.7 v59.18,30.61 | C15.1 61.38,29.93 v61.09,30.23 | TOTAL_BAT_CURRENT.8 63.12,26.04 v64.01,26.04 | CAP_CHARGING_CURRENT.8 53.72,26.34 v53.72,26.92 v55.63,28.83 | C32.1 22.35,21.04 MTR_OUT_CURRENT1.8 21.72,23.93 21.72,24.74 21.77,24.79 21.77,25.25 21.72,25.3 v21.72,26.8 | R25.2 52.97,41.66 v53.72,41.66
  Top 0.508: C15.1 63.12,27.47 63.12,26.04 | C5.2 40.77,57.87 C8.1 42.67,55.88 44.2,57.4 PROGRAMMER.4
  Signal1 0.254: v33.15,38.86 32.27,38.86 31.98,39.15 30.89,39.15 30.44,38.71 30.44,38.06 v26.8,34.42
  Signal2 0.254: v21.72,26.8 21.72,29.34 v26.8,34.42
  pour Bottom: -0.13,63.37 -0.13,54.23 0,54.1 11.43,54.1 36.96,28.57 66.93,28.57 66.93,63.25 65.66,64.52 1.02,64.52
VCC_12V  (via drill 0.3, 0.35, 0.51)
  Top 0.254: U$6.1 37.99,29.13 37.31,28.45 36.2,28.45 35.56,29.08 v35.56,31.24 | C21.1 42.6,33.47 43.19,33.47 43.56,33.09 43.56,32.57 43.19,32.19 43.12,32.19 v42.8,31.88
  Top 0.508: L2.2 1.47,57.99 v1.47,57.02 | C25.1 15.37,55.16 C26.2 | C26.2 15.16,54.61 16.17,53.6 17.69,53.6 17.99,53.9 17.99,53.97 R18.2 | C26.2 14.82,53.68 v14.61,53.47
  Signal2 0.254: v42.8,31.88 39.38,31.88 39.27,31.77 36.3,31.77 v35.69,32.38
  Signal2 0.508: v1.47,57.02 9.78,57.02 13.34,53.47 v14.61,53.47 15.16,52.91 15.16,51.92 30.51,36.58 31.5,36.58 v35.69,32.38
  pour Top: 35.81,35.69 35.81,33.15 34.71,32.05 34.71,30.35 36.07,30.35 36.2,30.48 37.08,30.48 37.59,30.99 37.59,35.56 37.47,35.69
VMTR
  pour Top: 18.41,29.84 19.81,29.84 19.94,29.72 19.94,17.02 16.64,13.72 13.21,13.72 11.94,14.99 11.94,23.11 16.38,23.11 16.51,23.24 16.51,27.05
VMTR_T
  pour Top: 22.48,47.62 12.19,47.62 11.62,47.05 11.62,36.51 13.08,35.05 16.89,35.05 20.7,31.24 20.7,27.3 21.08,26.92 22.35,26.92 22.99,27.56 22.99,32.77 26.67,36.45 26.67,45.47 26.04,46.1 24,46.1
VOUT  (via drill 0.51)
  Top 0.508: v28.57,44.83 29.76,44.83 R15.1 29.84,44.46 D4.C 28.19,41.95 27.27,41.03 27.27,39.98 28.11,39.15 R10.2
  other vias: 1.91,41.02 1.91,39.88 1.91,38.73 1.91,37.59 3.05,40.51 3.05,39.37 3.05,38.1 4.19,41.02 4.19,39.88 4.19,38.73 4.19,37.59 9.91,35.56 9.91,34.29 47.12,27.43 48.51,27.43 49.78,27.43 50.29,26.16 16.13,52.32 20.32,52.07 20.32,50.67 20.32,49.28 16.13,49.02 14.73,49.02 13.34,49.02 12.06,49.02 12.06,50.29 13.21,50.29 12.06,51.69
  pour Top: 0.76,41.15 0.76,34.54 1.52,33.78 8.51,33.78 10.29,32 16.76,32 16.76,34.04 16.64,34.16 12.57,34.16 10.67,36.07 10.67,40.89 10.03,41.53 1.14,41.53
  pour Signal1: -0.38,29.46 -0.25,29.34 40.51,29.34 41.78,28.07 41.78,25.4 42.55,24.64 49.53,24.64 51.05,26.16 51.05,32.77 21.84,32.77 11.05,43.56 -0.25,43.56 -0.38,43.43
  pour Top: 46.61,28.07 46.61,25.02 47.12,24.51 49.53,24.51 50.67,25.65 50.67,28.07
  pour Signal1: -0.51,59.56 -0.51,44.2 14.22,29.46 40.64,29.46 43.05,31.88 43.05,34.8 18.29,59.56
  pour Top: 11.56,48.39 11.56,52.2 12.19,52.83 21.46,52.83 21.46,48.39
VSW_NODE  (via drill 0.51)
  Top 0.254: U$6.5 41.66,29.11 41.66,28.07 40.26,26.67 39.15,26.67 38.92,26.44 38.92,25.34 37.72,24.13 L_MOS.9
  Top 0.508: C27.2 31.24,33.78 v29.97,33.78 | v6.6,49.28 6.69,49.19 L3.P$1 | L3.P$1 7.54,50.47 v7.62,50.55 | L3.P$1 8.9,50.55 v9.27,50.55 | L3.P$1 7.63,49.28 v8.51,49.28 | L3.P$1 8.09,49.19 v9.27,48.01 | L3.P$1 7.62,49.12 v7.62,48.01 | L3.P$1 6.36,48.01 v5.71,48.01 | L3.P$1 7.2,49.19 v5.84,50.55
  Signal2 0.508: v29.97,33.78 32.38,31.37 v32.38,24.13
  other vias: 32.38,22.73 32.38,21.34 32.38,25.53 32.38,26.92 9.27,45.97 9.27,44.58 9.27,43.18 7.62,44.7 7.62,45.97
  pour Top: 29.72,26.34 29.72,21.72 30.61,20.83 38.23,20.83 38.73,21.34 38.73,26.42 38.99,26.67 40.51,26.67 41.53,27.69 41.53,27.94 42.55,28.96 42.55,29.84 38.99,29.84 36.58,27.43 30.81,27.43
  pour Bottom: 2.67,51.82 2.67,47.75 29.97,20.45 40.39,20.45 41.15,21.21 41.15,27.81 36.07,27.81 10.67,53.21 4.06,53.21
  pour Top: 1.02,53.21 1.02,42.42 10.54,42.42 10.67,42.55 10.67,51.82 3.05,51.82 1.65,53.21
VSW_T  (via drill 0.51)
  other vias: 28.32,25.53 28.32,24.26 28.32,22.99 26.54,22.99 26.54,24.26 56.77,21.21 55.63,21.21 58.04,21.21 26.54,25.53
  pour Top: 23.88,30.48 23.88,21.59 24.64,20.83 28.83,20.83 28.83,26.54 30.48,28.19 33.78,28.19 34.73,29.15 33.4,30.48
  pour Signal1: 23.37,28.57 23.37,21.46 25.02,19.81 61.09,19.81 61.09,28.45 51.94,28.45 51.82,28.32 51.82,25.65 50.04,23.88 41.91,23.88 40.77,25.02 40.77,27.56 39.88,28.45 23.5,28.45
  pour Top: 55.63,23.88 57.78,23.88 57.91,23.75 57.91,20.95 55.24,20.95 55.24,23.5

## Text on the board
tNames: SUPER_CAP_CONTROLLER | COPYRIGHT: / Chengming Zhang / 2019/05/15
bNames: WARNING: POLOARITY ON THIS DEVICE IS INVERTED